# Altium PCB GWC-MCU-002-A.PcbDoc (part 1 of 2)
Units mm, origin at the board's own origin, x right, y up, seen from the top; angles counter-clockwise.
Board outline 121 x 53 mm, 2 copper layers (Top Layer, Bottom Layer), stack 1.601 mm thick; 192 components, 111 nets, 570 pads, 192 vias.
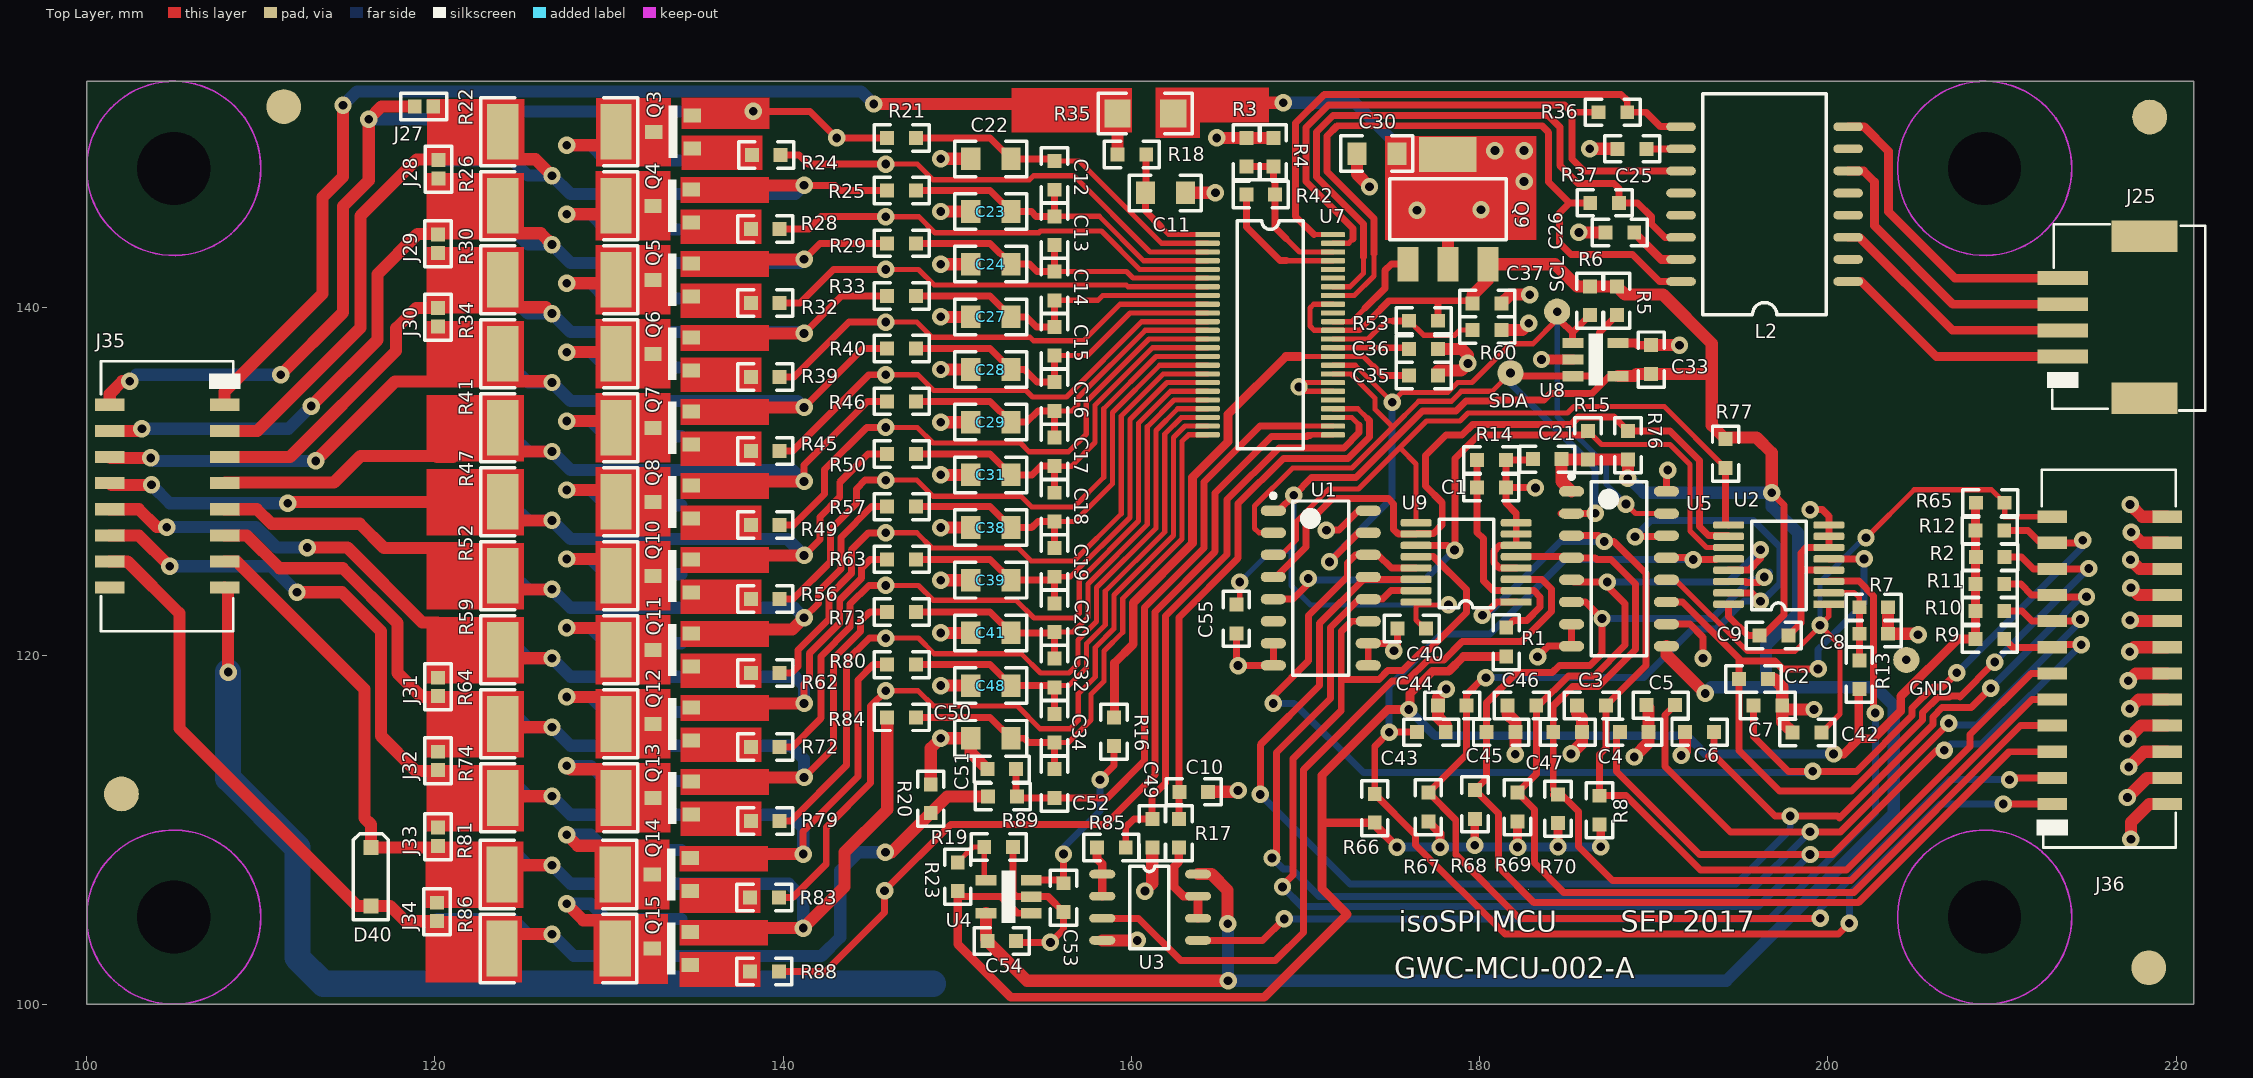
[diagram p0: Top Layer view]
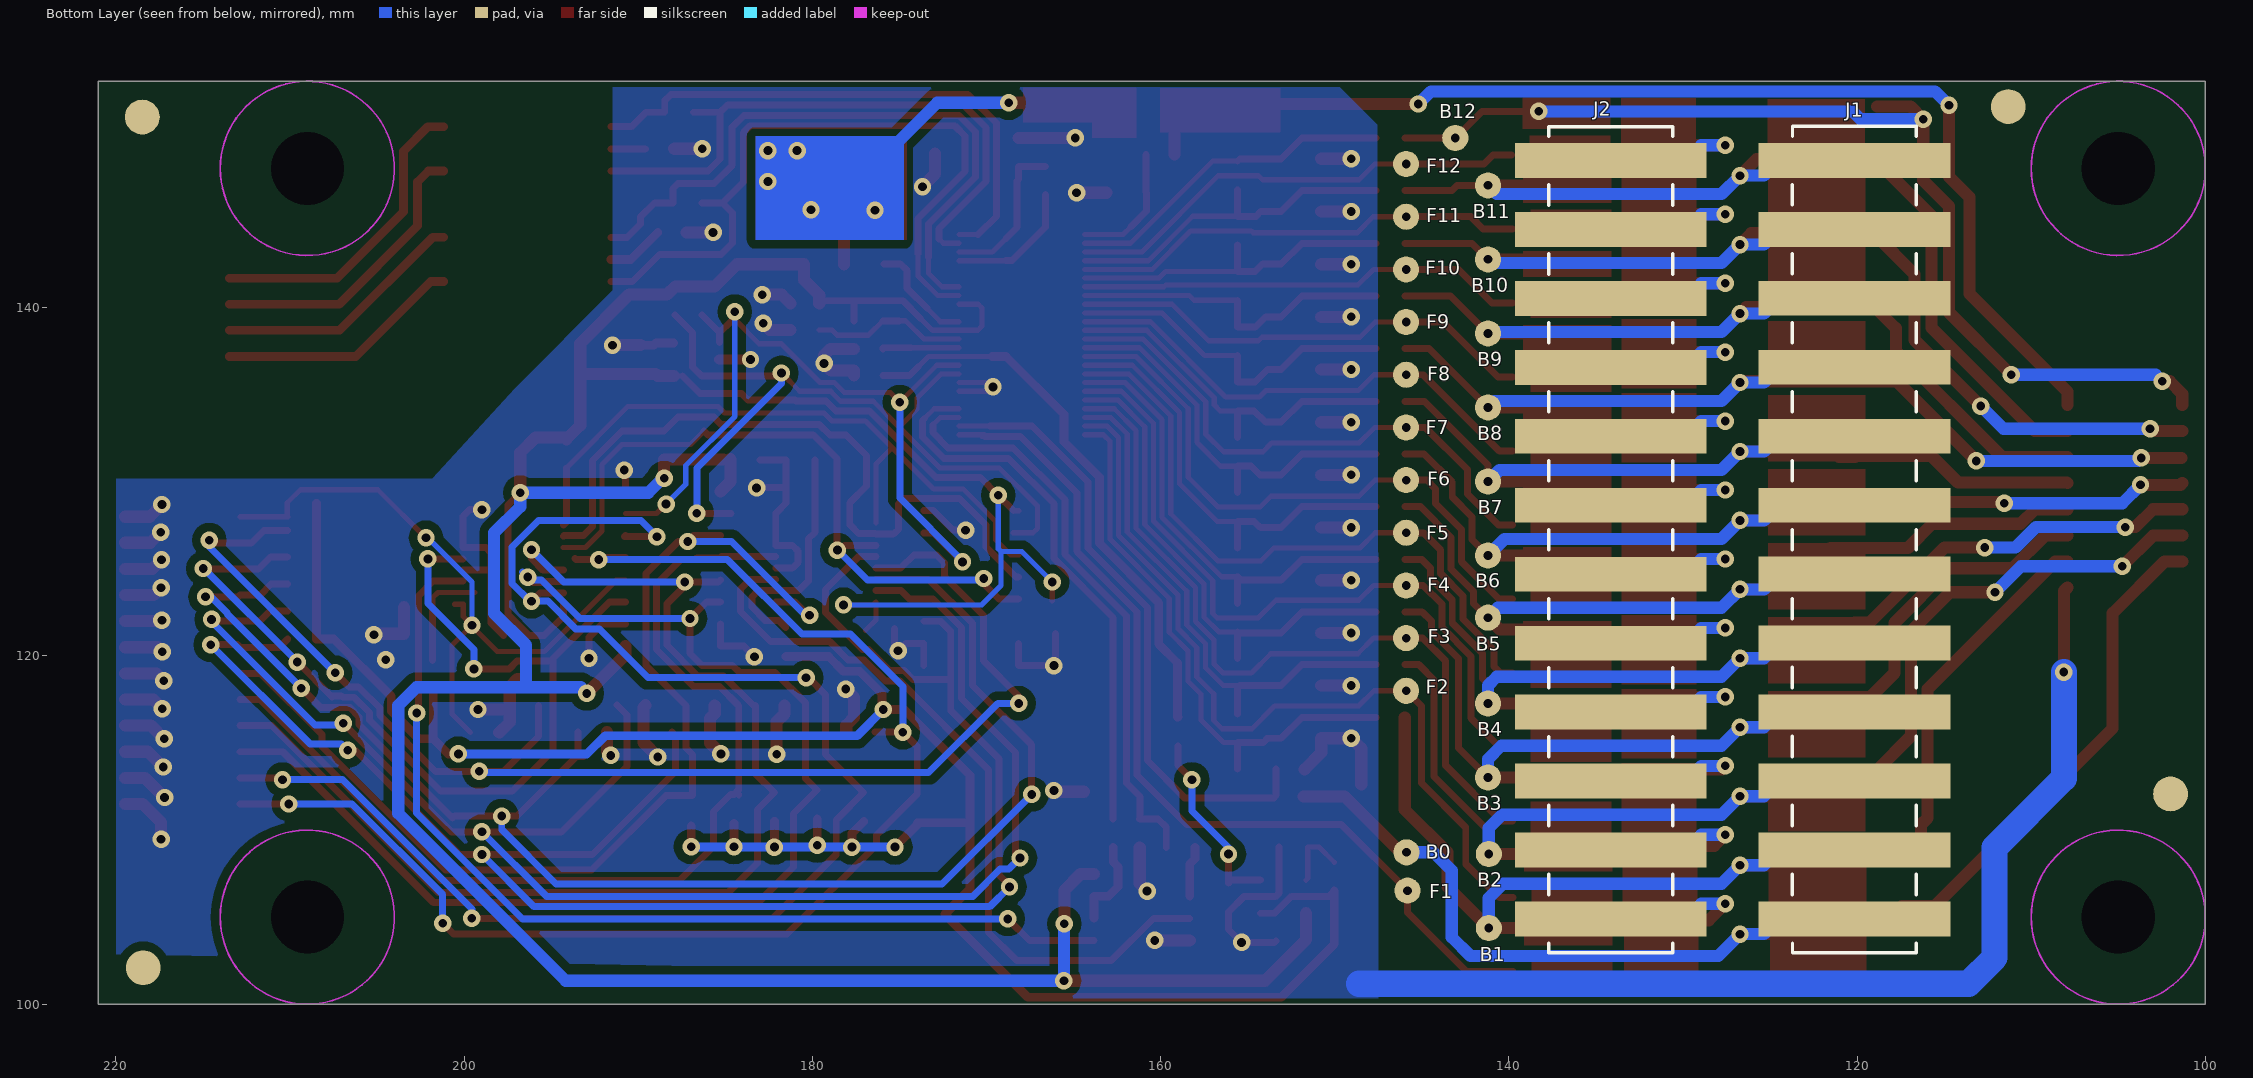
[diagram p1: Bottom Layer view, seen from below]

## Layer stack, top to bottom
Top Solder: solder mask 0.0102, Solder Resist, Dk 3.5
Top Layer: signal copper 0.0356
Dielectric1: core 1.53, FR-4, Dk 4.8
Bottom Layer: signal copper 0.0356
Bottom Solder: solder mask 0.0102, Solder Resist, Dk 3.5

## Board outline
100,100 221,100 221,153 100,153

## Design rules (kind name [scope] priority, off if disabled: settings)
AcuteAngle [All] p1: minimum=6.00000000000000E+0001 checktracksonly=FALSE
Clearance Clearance_1 [InNet('GND') And OnLayer('Bottom Layer')] p1: gap=0.5 ignorepadtopadclearanceinfootprint=FALSE except(0: Arc-Hole Track-Hole SMDPad-Hole THPad-Hole Via-Hole Fill-Hole Poly-Hole Region-Hole Text-Hole)
Clearance [All] p2: gap=0.2 ignorepadtopadclearanceinfootprint=FALSE except(0: Arc-Hole Track-Hole SMDPad-Hole THPad-Hole Via-Hole Fill-Hole Poly-Hole Region-Hole Text-Hole)
HoleSize [All] p1: absolutevalues=TRUE maxlimit=10 minlimit=0.5 maxpercent=80.000 minpercent=20.000
MinimumSolderMaskSliver [All] p1: minsoldermaskwidth=0.1
PolygonConnect PolygonConnect_1 [IsVia] p1: connectstyle=Direct reliefconductorwidth=0.254 reliefentries=4 polygonreliefangle="90 Angle" airgapwidth=0.254
PolygonConnect [All] p2: connectstyle=Relief reliefconductorwidth=0.5 reliefentries=4 polygonreliefangle="90 Angle" airgapwidth=0.254
RoutingVias [All] p1: holewidth=0.6 width=1.1 viastyle="Through Hole" minholewidth=0.5 minwidth=1 maxholewidth=1 maxwidth=2
SilkToSilkClearance [All] p1: silktosilkclearance=0.1
SilkToSolderMaskClearance SilkscreenOverComponentPads [IsPad] p1: minsilkscreentomaskgap=0.1 clearancetoexposedcopper=TRUE
SolderMaskExpansion [All] p1: expansion=0.102
Width [All] p1: maxlimit=10 minlimit=0.2 preferedwidth=0.4 minimp=50.000000 maximp=50.000000 favimp=50.000000
26 further rules are at their usual default settings.

## Classes and differential pairs
component class "GWC-MCU-002-A - Voltages": B0 B1 B2 B3 B4 B5 B6 B7 B8 B9 B10 B11 B12 C11 C12 C13 C14 C15 C16 C17 C18 C19 C20 C22 C23 C24 C25 C26 C27 C28 C29 C30 C31 C32 C33 C34 C35 C36 C37 C38 C39 C41 C48 C50 C51 C52 D40 F1 F2 F3 F4 F5 F6 F7 F8 F9 F10 F11 F12 GND J1 J2 J25 J27 J28 J29 J30 J31 J32 J33 J34 J35 L2 Q3 Q4 Q5 Q6 Q7 Q8 Q9 Q10 Q11 Q12 Q13 Q14 Q15 R3 R4 R5 R6 R18 R20 R21 R22 R24 R25 R26 R28 R29 R30 R32 R33 R34 R35 R36 R37 R39 R40 R41 R42 R45 R46 R47 R49 R50 R52 R53 R56 R57 R59 R60 R62 R63 R64 R72 R73 R74 R79 R80 R81 R83 R84 R86 R88 R89 SCL SDA U7 U8
component class "GWC-MCU-002-A - Temps": C1 C2 C3 C4 C5 C6 C7 C8 C9 C10 C21 C40 C42 C43 C44 C45 C46 C47 C49 C53 C54 C55 J36 R1 R2 R7 R8 R9 R10 R11 R12 R13 R14 R15 R16 R17 R19 R23 R65 R66 R67 R68 R69 R70 R76 R77 R85 U1 U2 U3 U4 U5 U9

## Components (designator, comment, footprint, x,y, rotation, side; value= is the part's Value field where it differs from the comment)
B0 "TP" "Test Point" 145.875,108.725 r270 bottom
B1 "TP" "Test Point" 141.15,104.375 r270 bottom
B2 "TP" "Test Point" 141.15,108.625 r180 bottom
B3 "TP" "Test Point" 141.2,113.025 r270 bottom
B4 "TP" "Test Point" 141.2,117.275 r180 bottom
B5 "TP" "Test Point" 141.2,122.2 r180 bottom
B6 "TP" "Test Point" 141.2,125.775 r180 bottom
B7 "TP" "Test Point" 141.2,130.025 r180 bottom
B8 "TP" "Test Point" 141.2,134.275 r180 bottom
B9 "TP" "Test Point" 141.2,138.525 r180 bottom
B10 "TP" "Test Point" 141.2,142.775 r180 bottom
B11 "TP" "Test Point" 141.2,147.025 r180 bottom
B12 "TP" "Test Point" 143.075,149.75 r180 bottom
C1 "100nF" C0603 180.675,129.675 r90 top
C2 "100nF" C0603 195.725,118.675 r90 top
C3 "100nF" C0603 186.425,117.15 r270 top
C4 "100nF" C0603 188.875,115.625 r90 top
C5 "100nF" C0603 190.4,117.175 r270 top
C6 "100nF" C0603 192.625,115.625 r270 top
C7 "100nF" C0603 196.55,117.15 r90 top
C8 "100nF" C0603 202.625,121.275 r90 top
C9 "100nF" C0603 196.9,121.175 r270 top
C10 "10nF" 0603 163.575,112.2 r270 top
C11 "100nF 100V" C0805 161.95,146.6 r90 top
C12 "10nF" 0603 155.575,147.6 r0 top
C13 "10nF" 0603 155.575,144.425 r0 top
C14 "10nF" 0603 155.575,141.25 r0 top
C15 "10nF" 0603 155.575,138.075 r0 top
C16 "10nF" 0603 155.575,134.9 r0 top
C17 "10nF" 0603 155.575,131.725 r0 top
C18 "10nF" 0603 155.575,128.55 r0 top
C19 "10nF" 0603 155.575,125.375 r0 top
C20 "10nF" 0603 155.575,122.2 r0 top
C21 "100nF" C0603 183.875,131.3 r90 top
C22 "100nF 100V" C0805 151.925,148.55 r270 top
C23 "100nF 100V" C0805 151.925,145.525 r270 top
C24 "100nF 100V" C0805 151.925,142.5 r270 top
C25 "100pF" C0603 188.75,149.125 r270 top
C26 "100pF" C0603 188.051,144.324 r270 top
C27 "100nF 100V" C0805 151.925,139.475 r270 top
C28 "100nF 100V" C0805 151.925,136.45 r270 top
C29 "100nF 100V" C0805 151.925,133.425 r270 top
C30 "100nF 100V" C0805 174.1,148.85 r270 top
C31 "100nF 100V" C0805 151.925,130.4 r270 top
C32 "10nF" 0603 155.575,119.025 r0 top
C33 "100nF" C0603 189.85,137.025 r0 top
C34 "10nF" 0603 155.575,115.85 r0 top
C35 "1uF" C0603 176.775,136.1 r90 top
C36 "1uF" C0603 176.775,137.625 r90 top
C37 "1uF" C0603 180.425,140.25 r90 top
C38 "100nF 100V" C0805 151.925,127.375 r270 top
C39 "100nF 100V" C0805 151.925,124.35 r270 top
C40 "100nF" C0603 176.1,121.575 r90 top
C41 "100nF 100V" C0805 151.925,121.325 r270 top
C42 "100nF" C0603 198.8,115.6 r270 top
C43 "100nF" C0603 177.225,115.625 r90 top
C44 "100nF" C0603 178.425,117.15 r270 top
C45 "100nF" C0603 181.225,115.625 r90 top
C46 "100nF" C0603 182.425,117.15 r270 top
C47 "100nF" C0603 185.05,115.625 r90 top
C48 "100nF 100V" C0805 151.925,118.3 r270 top
C49 "10nF" 0603 161.2,109.825 r180 top
C50 "100nF 100V" C0805 151.925,115.275 r270 top
C51 "10nF" 0603 152.55,113.5 r270 top
C52 "10nF" 0603 155.575,112.675 r0 top
C53 "100nF" C0603 156.1,106.125 r180 top
C54 "100nF" C0603 152.55,103.625 r270 top
C55 "100nF" C0603 166.025,122.125 r180 top
D40 "BAT46W-V" SOD-123 116.325,105.65 r0 top
F1 "TP" "Test Point" 145.825,106.525 r270 bottom
F2 "TP" "Test Point" 145.9,118 r180 bottom
F3 "TP" "Test Point" 145.9,121.025 r90 bottom
F4 "TP" "Test Point" 145.9,124.05 r180 bottom
F5 "TP" "Test Point" 145.9,127.075 r180 bottom
F6 "TP" "Test Point" 145.9,130.1 r180 bottom
F7 "TP" "Test Point" 145.9,133.125 r180 bottom
F8 "TP" "Test Point" 145.9,136.15 r180 bottom
F9 "TP" "Test Point" 145.9,139.175 r180 bottom
F10 "TP" "Test Point" 145.9,142.2 r180 bottom
F11 "TP" "Test Point" 145.9,145.225 r180 bottom
F12 "TP" "Test Point" 145.9,148.25 r180 bottom
GND "TP" "Test Point" 204.5,119.775 r0 top
J1 "12 Way FHP" "12 WAY FHP SOCKET" 120.15,126.68 r90 bottom locked
J2 "12 Way FHP" "12 WAY FHP SOCKET" 134.15,126.675 r90 bottom locked
J25 "SM04B-ZESS-TB" "4 Way ZESS Connecctor" 220.075,137.2 r90 top
J27 "Link" "Solder Link" 119.375,151.55 r180 top
J28 "Link" "Solder Link" 120.2,147.955 r90 top
J29 "Link" "Solder Link" 120.175,143.68 r90 top
J30 "Link" "Solder Link" 120.175,139.455 r90 top
J31 "Link" "Solder Link" 120.175,118.22 r90 top
J32 "Link" "Solder Link" 120.175,113.97 r90 top
J33 "Link" "Solder Link" 120.175,109.62 r90 top
J34 "Link" "Solder Link" 120.125,105.3 r90 top
J35 "SM16B-ZPDSS-TF" "16 Way ZPD Connecctor" 101.325,134.425 r270 top
J36 "SM24B-ZPDSS-TF" "24 Way ZPD Connecctor" 219.475,111.5 r90 top
L2 "HX1188" SO-16W-Choke 201.162,141.504 r180 top
Q3 "BSH205G2" SOT-23M 134.775,150.1 r90 top
Q4 "BSH205G2" SOT-23M 134.725,145.85 r90 top
Q5 "BSH205G2" SOT-23M 134.725,141.6 r90 top
Q6 "BSH205G2" SOT-23M 134.725,137.35 r90 top
Q7 "BSH205G2" SOT-23M 134.725,133.1 r90 top
Q8 "BSH205G2" SOT-23M 134.725,128.85 r90 top
Q9 "DZT5551" SOT-223T 178.175,142.5 r0 top
Q10 "BSH205G2" SOT-23M 134.725,124.6 r90 top
Q11 "BSH205G2" SOT-23M 134.725,120.35 r90 top
Q12 "BSH205G2" SOT-23M 134.725,116.1 r90 top
Q13 "BSH205G2" SOT-23M 134.725,111.85 r90 top
Q14 "BSH205G2" SOT-23M 134.675,107.45 r90 top
Q15 "BSH205G2" SOT-23M 134.675,103.2 r90 top
R1 "100K" 0603 181.525,120.8 r180 top
R2 "10K" 0603 209.325,125.675 r90 top
R3 "1K2" 0603 166.6,148.925 r180 top
R4 "1K2" 0603 168.15,148.925 r180 top
R5 "10K" 0603 187.875,140.4 r0 top
R6 "10K" 0603 186.325,140.4 r0 top
R7 "100K" 0603 202.625,122.8 r90 top
R8 "10K" 0603 186.875,111.15 r180 top
R9 "10K" 0603 209.3,120.975 r90 top
R10 "10K" 0603 209.3,122.575 r90 top
R11 "10K" 0603 209.3,124.125 r90 top
R12 "10K" 0603 209.3,127.2 r90 top
R13 "100K" 0603 201.8,118.925 r180 top
R14 "47K" 0603 180.675,131.25 r90 top
R15 "100K" 0603 186.225,132.1 r0 top
R16 "100R" 0603 159,115.65 r180 top
R17 "100R" 0603 162.725,109.825 r180 top
R18 "100R" 0603 160.025,148.8 r90 top
R19 "20K" 0603 152.375,109.025 r270 top
R20 "0R" 0603 148.475,111.8 r0 top
R21 "100R" 0603 146.8,149.75 r270 top
R22 "18R 1W" 2512 127.15,150.1 r90 top
R23 "10K" 0603 150.025,107.325 r180 top
R24 "3K3" 0603 139.025,148.775 r270 top
R25 "100R" 0603 146.8,146.725 r270 top
R26 "18R 1W" 2512 127.15,145.85 r90 top
R28 "3K3" 0603 138.975,144.525 r270 top
R29 "100R" 0603 146.8,143.7 r270 top
R30 "18R 1W" 2512 127.15,141.6 r90 top
R32 "3K3" 0603 138.975,140.275 r270 top
R33 "100R" 0603 146.8,140.675 r270 top
R34 "18R 1W" 2512 127.15,137.35 r90 top
R35 "220R" 1206 160.8,151.15 r270 top
R36 "120R" 0603 187.65,151.225 r90 top
R37 "120R" 0603 187.175,146.025 r90 top
R39 "3K3" 0603 138.975,136.025 r270 top
R40 "100R" 0603 146.8,137.65 r270 top
R41 "18R 1W" 2512 127.15,133.1 r90 top
R42 "1K4" 0603 167.425,146.5 r270 top
R45 "3K3" 0603 138.975,131.775 r270 top
R46 "100R" 0603 146.8,134.625 r270 top
R47 "18R 1W" 2512 127.15,128.85 r90 top
R49 "3K3" 0603 138.975,127.525 r270 top
R50 "100R" 0603 146.8,131.6 r270 top
R52 "18R 1W" 2512 127.15,124.6 r90 top
R53 "47K" 0603 176.775,139.25 r90 top
R56 "3K3" 0603 138.975,123.275 r270 top
R57 "100R" 0603 146.8,128.575 r270 top
R59 "18R 1W" 2512 127.15,120.35 r90 top
R60 "0R" 0603 180.425,138.725 r90 top
R62 "3K3" 0603 138.975,119.025 r270 top
R63 "100R" 0603 146.8,125.55 r270 top
R64 "18R 1W" 2512 127.15,116.1 r90 top
R65 "10K" 0603 209.325,128.8 r90 top
R66 "10K" 0603 173.975,111.25 r180 top
R67 "10K" 0603 177.05,111.325 r180 top
R68 "10K" 0603 179.725,111.475 r180 top
R69 "10K" 0603 182.175,111.325 r180 top
R70 "10K" 0603 184.5,111.225 r180 top
R72 "3K3" 0603 138.975,114.775 r270 top
R73 "100R" 0603 146.8,122.525 r270 top
R74 "18R 1W" 2512 127.15,111.85 r90 top
R76 "100K" 0603 188.525,132.1 r0 top
R77 "100K" 0603 194.125,131.625 r0 top
R79 "3K3" 0603 138.975,110.525 r270 top
R80 "100R" 0603 146.8,119.5 r270 top
R81 "18R 1W" 2512 127.1,107.45 r90 top
R83 "3K3" 0603 138.925,106.125 r270 top
R84 "100R" 0603 146.8,116.475 r270 top
R85 "100R" 0603 158.85,109 r90 top
R86 "18R 1W" 2512 127.1,103.2 r90 top
R88 "3K3" 0603 138.925,101.875 r270 top
R89 "100R" 0603 152.6,111.925 r270 top
SCL "TP" "Test Point" 184.45,139.775 r0 top
SDA "TP" "Test Point" 181.775,136.25 r0 top
U1 "TPIC2810" SOIC127P600-TPIC2810 170.875,123.9 r0 top
U2 "74HC4051PW" TSSOP-16 200.05,122.975 r180 top
U3 "MCP6062" SO-8 158.325,107.475 r0 top
U4 "MCP6061" SOT-23-5 154.25,106.175 r90 top
U5 "TPIC2810" SOIC127P600-TPIC2810 188,125.005 r0 top
U7 "LTC6811-1" SSOP-48 167.975,138.45 r0 top
U8 "24AA01" SOT-23-5 185.35,137.025 r270 top
U9 "74HC4051PW" TSSOP-16 182.1,123.1 r180 top

## Footprints (in the part's own frame and the unit in brackets; to place one, negate y for a bottom-side part, rotate by r counter-clockwise, add the part's x,y. Pads: shape width x height; smd on the part's side, far side on the other; paste and mask are expansions set on the pad)
"4 Way ZESS Connecctor" [mm] "SM04B-ZESS-TB(LF)(SN)"
  rect 1.8x3.8 smd: 0(-2.4,1.9) 0(6.9,1.9)
  rect 0.8x2.9 smd: 1(0,6.6) 2(1.5,6.6) 3(3,6.6) 4(4.5,6.6)
  silkscreen extent -3.1,-1.6 7.6,7.5, body extent -2.95,-1.55 7.55,7.15, height 5.8
"12 WAY FHP SOCKET" [mm] "12 way 3.96mm SMT socket"
  rect 2x11 smd: 1(-21.78,0) 2(-17.82,0) 3(-13.86,0) 4(-9.9,0) 5(-5.94,0) 6(-1.98,0) 7(1.98,0) 8(5.94,0) 9(9.9,0) 10(13.86,0) 11(17.82,0) 12(21.78,0)
  silkscreen extent -23.73,-3.55 23.73,3.56, body extent -24.03,-3.55 23.52,3.56, height 9.36
"16 Way ZPD Connecctor" [mm] "SM16B-ZPDSS-TF(LF)(SN)"
  rect 0.7x1.7 smd: 1(0,6.6) 2(0,0) 3(1.5,6.6) 4(1.5,0) 5(3,6.6) 6(3,0) 7(4.5,6.6) 8(4.5,0) 9(6,6.6) 10(6,0) 11(7.5,6.6) 12(7.5,0) 13(9,6.6) 14(9,0) 15(10.5,6.6) 16(10.5,0)
  silkscreen extent -2.5,-0.5 13,7.5, body extent -2.6,-0.5 13.1,7.1, height 7.65
"24 Way ZPD Connecctor" [mm] "SM24B-ZPDSS-TF"
  rect 0.7x1.7 smd: 1(0,6.6) 2(0,0) 3(1.5,6.6) 4(1.5,0) 5(3,6.6) 6(3,0) 7(4.5,6.6) 8(4.5,0) 9(6,6.6) 10(6,0) 11(7.5,6.6) 12(7.5,0) 13(9,6.6) 14(9,0) 15(10.5,6.6) 16(10.5,0) 17(12,6.6) 18(12,0) 19(13.5,6.6) 20(13.5,0) 21(15,6.6) 22(15,0) 23(16.5,6.6) 24(16.5,0)
  silkscreen extent -2.5,-0.5 19.2,7.5, body extent -2.6,-0.5 19.1,7.1, height 7.65
0603 [mm] "Generic surface mount part"
  rect 0.8x0.8 smd: 1(0,-0.825) 2(0,0.825)
  silkscreen extent -0.75,-1.58 0.75,1.58, body extent -0.4,-0.8 0.4,0.8, height 0.45
1206 [mm] "Generic surface mount part"
  rect 1.6x1.5 smd paste-0.15: 1(0,-1.6) 2(0,1.6)
  silkscreen extent -1.15,-2.71 1.15,2.71, body extent -0.8,-1.6 0.8,1.6, height 0.6
2512 [mm] "Generic surface mount part"
  rect 3.2x1.8 smd paste-0.18: 1(0,-3.25) 2(0,3.25)
  silkscreen extent -1.95,-4.5 1.95,4.5, body extent -1.6,-3.25 1.6,3.25, height 0.8
C0603 [mm] "Generic surface mount capacitor"
  rect 0.8x0.8 smd: 1(0,-0.825) 2(0,0.825)
  silkscreen extent -0.75,-1.58 0.75,1.58, body extent -0.4,-0.8 0.4,0.8, height 0.8
C0805 [mm] "Generic surface mount part"
  rect 1.3x1.1 smd paste-0.11: 1(0,-1.15) 2(0,1.15)
  silkscreen extent -1.02,-2.07 1.02,2.07, body extent -0.63,-1 0.62,1, height 1
SO-8 [mm] "Generic SO-8 surface mount package"
  oval 1.5x0.5 smd mask+0.09: 1(0,0) 2(0,-1.27) 3(0,-2.54) 4(0,-3.81) 5(5.5,-3.81) 6(5.5,-2.54) 7(5.5,-1.27) 8(5.5,0)
  silkscreen extent 1.58,-4.28 3.82,0.46, body extent 0.75,-4.3 4.75,0.5, height 1.6
SO-16W-Choke [mm] "300mil wide SO-16 for Ethernet transformer"
  oval 1.7x0.5 smd: 1(0,0) 2(0,-1.27) 3(0,-2.54) 4(0,-3.81) 5(0,-5.08) 6(0,-6.35) 7(0,-7.62) 8(0,-8.89) 9(9.6,-8.89) 10(9.6,-7.62) 11(9.6,-6.35) 12(9.6,-5.08) 13(9.6,-3.81) 14(9.6,-2.54) 15(9.6,-1.27) 16(9.6,0)
  silkscreen extent 1.25,-10.79 8.35,1.91, body extent 1.25,-10.79 8.35,1.91, height 6.55
SOD-123 [mm] "Generic Surface mount diode"
  rect 0.85x0.85 smd paste-0.1: A(0,0) K(0,3.35)
  silkscreen extent -1,-0.8 1,4.15, body extent -0.85,0.25 0.85,3.05, height 1.1
SOIC127P600-TPIC2810 [mm] "TPIC2810"
  oval 1.45x0.6 smd: 1(-2.725,4.445) 2(-2.725,3.175) 3(-2.725,1.905) 4(-2.725,0.635) 5(-2.725,-0.635) 6(-2.725,-1.905) 7(-2.725,-3.175) 8(-2.725,-4.445) 9(2.725,-4.445) 10(2.725,-3.175) 11(2.725,-1.905) 12(2.725,-0.635) 13(2.725,0.635) 14(2.725,1.905) 15(2.725,3.175) 16(2.725,4.445)
  silkscreen extent -2.85,-5 1.6,5.42, body extent -3,-5 3,5, height 2.65
"Solder Link" [mm] "Option link using solder bridge"
  rect 0.8x0.8 smd: 1(0.53,0) 2(-0.53,0)
  silkscreen extent -1.32,-0.75 1.32,0.75, body extent -0.78,-0.4 0.82,0.4, height 0.45
SOT-23-5 [mm] "Generic Surface mount SOT-23 5 pin package"
  rect 0.6x1.2 smd: 1(-0.95,0) 2(0,0) 3(0.95,0) 4(0.95,2.6) 5(-0.95,2.6)
  silkscreen extent -1.5,0.9 1.5,1.72, body extent -1.5,0.38 1.5,2.17, height 1.3
SOT-23M [mm] "Generic surface mount mosfet transistor"
  rect 0.8x1 smd: D(0,2.2) G(-0.95,0) S(0.95,0)
  silkscreen extent -1.5,0.85 1.5,1.35, body extent -1.5,0.38 1.5,1.78, height 1.1
SOT-223T [mm] "Generic surface mount bipolar transistor"
  rect 1.2x2 smd paste-0.1: B(-2.3,0) C(0,0) E(2.3,0)
  rect 3.3x2 smd paste-0.15: C(0,6.3)
  silkscreen extent -3.35,1.4 3.35,4.9, body extent -3.35,1.3 3.35,5, height 1.8
SSOP-48 [mm] "48 pin SSOP"
  rect 1.4x0.3 smd: 1(-3.6,5.75)
  rrect50% 1.4x0.3 smd: 2(-3.6,5.25) 3(-3.6,4.75) 4(-3.6,4.25) 5(-3.6,3.75) 6(-3.6,3.25) 7(-3.6,2.75) 8(-3.6,2.25) 9(-3.6,1.75) 10(-3.6,1.25) 11(-3.6,0.75) 12(-3.6,0.25) 13(-3.6,-0.25) 14(-3.6,-0.75) 15(-3.6,-1.25) 16(-3.6,-1.75) 17(-3.6,-2.25) 18(-3.6,-2.75) 19(-3.6,-3.25) 20(-3.6,-3.75) 21(-3.6,-4.25) 22(-3.6,-4.75) 23(-3.6,-5.25) 24(-3.6,-5.75) 25(3.6,-5.75) 26(3.6,-5.25) 27(3.6,-4.75) 28(3.6,-4.25) 29(3.6,-3.75) 30(3.6,-3.25) 31(3.6,-2.75) 32(3.6,-2.25) 33(3.6,-1.75) 34(3.6,-1.25) 35(3.6,-0.75) 36(3.6,-0.25) 37(3.6,0.25) 38(3.6,0.75) 39(3.6,1.25) 40(3.6,1.75) 41(3.6,2.25) 42(3.6,2.75) 43(3.6,3.25) 44(3.6,3.75) 45(3.6,4.25) 46(3.6,4.75) 47(3.6,5.25) 48(3.6,5.75)
  silkscreen extent -1.9,-6.55 1.9,6.55, body extent -2.8,-6.55 2.8,6.55, height 1.85
"Test Point" [mm] "Probe pad (single sided)"
  round 1.5 smd paste-1: 1(0,0)
TSSOP-16 [mm]
  rect 1.78x0.42 smd mask+0.09: 1(0,0)
  rrect50% 1.78x0.42 smd mask+0.09: 2(0,-0.65) 3(0,-1.3) 4(0,-1.95) 5(0,-2.6) 6(0,-3.25) 7(0,-3.9) 8(0,-4.55) 9(5.75,-4.55) 10(5.75,-3.9) 11(5.75,-3.25) 12(5.75,-2.6) 13(5.75,-1.95) 14(5.75,-1.3) 15(5.75,-0.65) 16(5.75,0)
  silkscreen extent 1.3,-4.75 4.43,0.33, body extent 0.6,-4.8 5.1,0.2, height 1.2

## Part data
B0 B1 B2 B3 B4 B5 B6 B7 B8 B9 B10 B11 B12 F1 F2 F3 F4 F5 F6 F7 F8 F9 F10 F11 F12 GND SCL SDA: "Test point", Manufacturer=NA, Part number="Test Point", Component Type=Pad, Specification="1.5mm dia Single Sided"
C1 C2 C3 C4 C5 C6 C7 C8 C9 C21 C33 C40 C42 C43 C44 C45 C46 C47 C53 C54 C55: library part "100nF X7R 0603", "100nF 0603 Non Polarised Capacitor", Manufacturer=Kemet, Part number=C0603C104K5RAC, Supplier Part Number 1=1288255, Tolerance=10%, Component Type=SMD, Specification="X7R 50V", Supplier=Farnell, Supplier 1=Farnell, Supplier 2=Digi-Key, Supplier 3=Arrow, Supplier 4=Newark, Supplier No.=128-8255, Supplier Part Number 2=399-5089-1-ND, Supplier Part Number 3=13owRFewPNmjSPXc-JuBeSWHfU3DuBufwBIDEpzGmQ0, Supplier Part Number 4=72J5992
C10 C12 C13 C14 C15 C16 C17 C18 C19 C20 C32 C34 C49 C51 C52: library part "10nF 0603 X7R", "10nF Non Polarised Capacitor", Manufacturer=Kemet, Part number=C0603C103K5RACTU, Supplier Part Number 1=1414609, Tolerance=10%, Component Type=SMD, Specification="X7R 50V", Supplier=Farnell, Supplier 1=Farnell, Supplier 2=Digi-Key, Supplier No.=141-4609, Supplier Part Number 2=399-1091-1-ND
C11 C22 C23 C24 C27 C28 C29 C30 C31 C38 C39 C41 C48 C50: library part "100nF X7R 0805", "100nF 0805 Non Polarised Capacitor", Manufacturer=AVX, Part number=08051C104K4T2A, Supplier Part Number 1=1833888, Tolerance=10%, Component Type=SMD, Specification="X7R 100V", Supplier=Farnell, Supplier 1=Farnell, Supplier 2=Digi-Key, Supplier 3=Arrow, Supplier 4=Newark, Supplier No.=183-3888, Supplier Part Number 2=478-4525-1-ND, Supplier Part Number 3=thCAXxQKhySVZl-gwSbrFi2B4okyfaS8lrYqWDAKxeI, Supplier Part Number 4=85R5692
C25 C26: library part "100pF 0603 COG", "100pF Non Polarised Capacitor", Manufacturer=Murata, Part number=GRM1885C1H101JA01D, Supplier Part Number 1=8819866, Tolerance=5%, Component Type=SMD, Specification=COG, Supplier=Farnell, Supplier 1=Farnell, Supplier 2=Digi-Key, Supplier No.=881-9866, Supplier Part Number 2=490-1427-1-ND
C35 C36 C37: library part "1uF X7R 0603", "1uF Non Polarised Capacitor", Manufacturer=Kemet, Part number=C0603C105K4RACTU, Supplier Part Number 1=1650837, Tolerance=10%, Component Type=SMD, Specification="X7R 16V", Supplier=Farnell, Supplier 1=Farnell, Supplier 2=Digi-Key, Supplier No.=165-0837, Supplier Part Number 2=399-7847-1-ND
D40: "Small Signal Schottky Diode", Manufacturer=Vishay, Part number="BAT46W-V / GS08", Supplier Part Number 1=1612327, Component Type=SMD, Specification="100V 150mA", Supplier=Farnell, Supplier 1=Farnell, Supplier No.=161-2327
J1 J2: library part "12 Way FHP SMT", "12 Way FHP SMT", Manufacturer=Samtec, Part number=FHP-12-02-T-S, Supplier Part Number 1=1931569, Component Type=SMT, Specification="3.96mm pitch", Supplier=Samtec, Supplier 1=Farnell, Supplier No.=FHP-12-02-T-S
J25: library part "4 Way CPT (Side Entry)", "4 Way CPT Connector (Side Entry)", Manufacturer=JST, Part number=SM04B1-CPTK-1A-TB, Component Type=SMD, Specification="3A 50V", Supplier=Mouser, Supplier No.=306-SM04B1-CPTK-1ATB
J27 J28 J29 J30 J31 J32 J33 J34: library part "Link Pad", "Bridge Link Pads", Component Type=Pad
J35: library part "Header 8X2", "Header, 16-Pin, Dual row, SM16B-ZPDSS-TF", LatestRevisionDate=17-Jul-2002, LatestRevisionNote="Re-released for DXP Platform.", Publisher="Altium Limited"
J36: library part "Header 12X2", "Header, 24-Pin, Dual row, SM24B-ZPDSS-TF", LatestRevisionDate=17-Jul-2002, LatestRevisionNote="Re-released for DXP Platform.", Publisher="Altium Limited"
L2: library part HX1188FNL, "Dual Ethernet Transformer & CM Choke", Manufacturer=Pulse, Part number=HX1188FNLT, Supplier Part Number 1=673-HX1188FNLT, Component Type=SMD, Specification="-40/+85 deg C 350uH 1:1", Supplier=Mouser, Supplier 1=Mouser, Supplier 2=Digi-Key, Supplier No.=673-HX1188FNLT, Supplier Part Number 2=553-2208-1-ND
Q3 Q4 Q5 Q6 Q7 Q8 Q10 Q11 Q12 Q13 Q14 Q15: library part BSH205, "P Channel MOSFET", Manufacturer=NXP, Supplier Part Number 1=2498570, Component Type=SMD, Part number=BSH205G2, Specification="P-CH 20V 2A 0.12R", Supplier=Farnell, Supplier 1=Farnell, Supplier No.=249-8570
Q9: "NPN Transistor", Manufacturer=DIODES, Supplier Part Number 1=2061423, Component Type=SMD, Part number=DZT5551, Specification="160V, 2W, 600mA", Supplier=Farnell, Supplier 1=Farnell, Supplier 2=Newark, Supplier No.=206-1423, Supplier Part Number 2=65T8243
R1 R7 R13 R15 R76 R77: library part "100K 0603 Resistor", "100K 0603 Resistor", Manufacturer=Phycomp, Part number=RC0603FR-07100KL, Supplier Part Number 1=1117236, Tolerance=1%, Component Type=SMD, Specification="0.063W 50V", Supplier=Farnell, Supplier 1=Farnell, Supplier 2=RS-Components, Supplier 3=Digi-Key, Supplier 4=TME, Supplier 5=Newark, Supplier No.=111-7236, Supplier Part Number 2=504-8940, Supplier Part Number 3=311-100KHRCT-ND, Supplier Part Number 4=RC0603FR-07100K, Supplier Part Number 5=68R0051
R2 R5 R6 R8 R9 R10 R11 R12 R65 R66 R67 R68 R69 R70: library part "10K 0603 Resistor", "10K 0603 Resistor", Manufacturer=Phycomp, Part number="2322 7046 1003", Supplier Part Number 1=1117235, Tolerance=1%, Component Type=SMD, Specification="0.063W 50V", Supplier=Farnell, Supplier 1=Farnell, Supplier No.=111-7235
R3 R4: library part "1K2 0603 Resistor", "1K2 0603 Resistor", Manufacturer=Multicomp, Part number=MCHP03W8F1201T5E, Supplier Part Number 1=1576284, Component Type=SMD, Specification="0.125W 50V", Supplier=Farnell, Supplier 1=Farnell, Supplier No.=157-6284
R14 R53: library part "47K 0603 Resistor", "47K 0603 Resistor", Manufacturer=Phycomp, Part number="2322 7046 4703", Supplier Part Number 1=9238689, Tolerance=1%, Component Type=SMD, Specification="0.1W 50V", Supplier=Farnell, Supplier 1=Farnell, Supplier No.=923-8689
R16 R17 R18 R19 R21 R23 R25 R29 R33 R40 R46 R50 R57 R63 R73 R80 R84 R85 R89: library part "100R 0603 Resistor", "100R 0603 Resistor", Manufacturer=Multicomp, Part number="MC 0.063W 0603 1% 100R", Supplier Part Number 1=9330364, Tolerance=1%, Component Type=SMD, Specification="0.063W 50V", Supplier=Farnell, Supplier 1=Farnell, Supplier No.=933-0364
R20 R60: library part "0R 0603 Link", "0R 0603 Link", Manufacturer=Multicomp, Part number="MC 0.063W 0603 0R", Supplier Part Number 1=9331662, Tolerance=1%, Component Type=SMD, Specification="0.1W 50V", Supplier=Farnell, Supplier 1=Farnell, Supplier No.=933-1662
R22 R26 R30 R34 R41 R47 R52 R59 R64 R74 R81 R86: library part "18R 2512 Resistor", "18R 2512 Resistor", Manufacturer=Tyco, Part number=352018RJT, Supplier Part Number 1=1265175, Tolerance=5%, Component Type=SMD, Specification=1W, Supplier=Farnell, Supplier 1=Farnell, Supplier 2=RS-Components, Supplier 3=Mouser, Supplier 4=Newark, Supplier No.=126-5175, Supplier Part Number 2=224-0171, Supplier Part Number 3=279-352018RJT, Supplier Part Number 4=18R3518
R24 R28 R32 R39 R45 R49 R56 R62 R72 R79 R83 R88: library part "3K3 0603 Resistor", "3K3 0603 Resistor", Manufacturer=Multicomp, Part number="MC 0.063W 0603 1% 3K3", Supplier Part Number 1=9331026, Tolerance=1%, Component Type=SMD, Specification="0.1W 50V", Supplier=Farnell, Supplier 1=Farnell, Supplier No.=933-1026
R35: library part "220R 1206 Resistor", "220R 1206 Resistor", Manufacturer="Tyco Electronics", Part number=CRG1206F220R, Supplier Part Number 1=223-2164, Tolerance=1%, Component Type=SMD, Specification=0.25W, Supplier=RS, Supplier 1=RS-Components, Supplier No.=223-2164
R36 R37: library part "120R 0603 Resistor", "120R 0603 Resistor", Manufacturer=Vishay, Part number=CRCW0603120RFKEAHP, Supplier Part Number 1=1738892, Tolerance=1%, Component Type=SMD, Specification="0.25W 75V", Supplier=Farnell, Supplier 1=Farnell, Supplier 2=Newark, Supplier No.=173-8892, Supplier Part Number 2=41R4624
R42: library part "1K4 0603 Resistor", "1K4 0603 Resistor", Manufacturer=Vishay, Part number=CRCW06031K40FKEA, Supplier Part Number 1=1469742, Tolerance=1%, Component Type=SMD, Specification="0.1W 75V", Supplier=Farnell, Supplier 1=Farnell, Supplier 2=Mouser, Supplier 3=Digi-Key, Supplier No.=146-9742, Supplier Part Number 2=71-CRCW0603-1.4K-E3, Supplier Part Number 3=541-1.40KHCT-ND
U1 U5: "TPIC2810D -  Led Driver, 8 Outputs, I2C, 3V-5.5V", Manufacturer=Texas, Supplier Part Number 1=595-TPIC2810D, Component Type=SMD, Part number=TPIC2810, Specification="-40/+85 deg C", Supplier=Farnell, Supplier 1=Mouser, Supplier 2=Digi-Key, Supplier No.=1648761, Supplier Part Number 2=296-21426-5-ND
U2 U9: "8 Channel Analogue Switch", Manufacturer=NXP, Part number=74HC4051PW-Q100,11, Supplier Part Number 1=2445304, Component Type=SMD, Specification="-40/+125 deg C", Supplier=Farnell, Supplier 1=Farnell, Supplier 2=Mouser, Supplier 3=Digi-Key, Supplier No.=244-5304, Supplier Part Number 2=771-74HC4051PW-Q100, Supplier Part Number 3=568-10114-1-ND
U3: "Dual Opamp", Manufacturer=Microchip, Part number=MCP6062-E/SN, Component Type=SMD, Specification="-40 to +125", Supplier=Farnell, Supplier No.=182-5029
U4: "Micropower CMOS Op Amp", Manufacturer=Microchip, Part number=MCP6061T-E/OT, Supplier Part Number 1=1863959, Component Type=SMD, Specification="Rail to rail In&Out, low Vos", Supplier=Farnell, Supplier 1=Farnell, Supplier 2=Digi-Key, Supplier 3=Newark, Supplier No.=186-3959, Supplier Part Number 2=MCP6061T-E/OTCT-ND, Supplier Part Number 3=23T2817
U7: "Multicell  Battery Stack Monitor", Manufacturer="Linear Tech", Part number=LTC6811G-1, Component Type=SMD, Specification=60V, Supplier=Linear, Supplier No.=LTC6811G-1
U8: "1K I2C EEPROM", Manufacturer=Atmel, Part number=24AA01T-I/OT, Supplier Part Number 1=1331269, Component Type=SMD, Specification="-40/+85 deg C 1.7-5.5V", Supplier=Farnell, Supplier 1=Farnell, Supplier 2=Digi-Key, Supplier 3=Arrow, Supplier 4=TME, Supplier 5=Newark, Supplier No.=133-1269, Supplier Part Number 2=24AA01T-I/OTCT-ND, Supplier Part Number 3=qa4xD_1fnMD5lAuD9KKDLGSjiRfODrYyphIlkbDuu6Y, Supplier Part Number 4=24AA01T-I/OT, Supplier Part Number 5=35M0694

## Free pads (board coordinates)
  round 4 hole 4.2 unplated: 0(105,105) 0(105,148) 0(209,105) 0(209,148)
  round 2 smd paste+0.4 mask+0.4: 1(111.325,151.55) 2(102,112.075) 3(218.425,102.1) 4(218.475,150.95)
  round 2 smd far side paste+0.4 mask+0.4: 1(111.325,151.55) 2(102,112.075) 3(218.425,102.1) 4(218.475,150.95)

## Via types
v1: diameter 1, hole 0.5, Top Layer to Bottom Layer, 192 vias

## Nets (pads, with @x,y where several pads share a name; then routed paths per layer and width w, separated by ;. In a path a pad name is that pad's centre, name@x,y a point inside that pad or via, vN(x,y) a via of type N, cw(c..) or ccw(c..) an arc to the next point about the centre after c; other vN are vias at no path point)
+5V: C9.1 C21.1 C33.1 C37.2 C40.1 C54.1 C55.1 Q9.E R5.2 R6.2 R15.1 R53.1 R76.1 R77.2 U1.1 U2.16 U3.8 U4.5 U5.1 U5.9 U7.37 U7.40 U8.4 U9.16 | length 220.9
  Top Layer w0.3: C55.1@166.225,123.15 v1(166.225,124.25) ; U1.1@168.15,128.345 U1.1@168.445,128.345 ; U7.40@171.575,140.2 170.475,140.2 170.25,139.975 170.25,138.95 170.5,138.7 U7.37@171.575,138.7 173.1,138.7 173.814,139.414 ; C40.1@176.95,121.475 176.35,122.075 U9.16@176.35,123.1 176.519,122.931 v1(178.209,122.931) ; U8.4@187.45,136.075 U8.4@187.95,136.075
  Top Layer w0.4: U1.1@168.445,128.345 v1(169.325,129.225) 170.35,130.25 172.901,130.25 176.726,134.075 178.65,134.075 179.225,134.65 180.953,134.65 181.003,134.7 183.7,134.7 184.075,135.075 186.45,135.075 U8.4@187.45,136.075 ; 173.814,139.414 174.8,140.4 177.6,140.4 ; R53.1@177.6,139.25 177.6,140.4 ; C37.2@179.45,140.4 177.6,140.4 ; U2.16@194.3,122.975 194.3,122.275 195.4,121.175 C9.1@196.075,121.175 196.284,121.175 197.475,122.366 197.475,128.675 v1(196.775,129.375)
  Top Layer w0.7: U4.5@151.65,105.225 151.65,103.7 C54.1@151.725,103.625 154,101.35 v1(165.55,101.35) ; U3.8@163.825,107.475 164.6,107.475 165.525,106.55 v1(165.525,104.625) ; C37.2@179.6,140.25 179.6,140.725 180.475,141.6 Q9.E@180.475,142.5 184.325,142.5 185.6,141.225 R5.2@187.875,141.225 188.346,140.754 190.521,140.754 193.325,137.95 193.325,133.25 R77.2@194.125,132.45 ; C21.1@184.7,131.3 184.7,130.025 U5.1@185.275,129.45 ; 185.1,131.275 R15.1@186.225,131.275 R76.1@188.525,131.275 188.525,130.175 188.509,130.191 v1(188.509,130.206) ; U8.4@187.95,136.075 188.875,136.075 189,136.2 C33.1@189.85,136.2 193.325,136.2 ; U5.9@190.725,120.56 190.725,120.075 v1(192.95,117.85) ; R77.2@194.125,132.55 195.9,132.55 196.775,131.675 v1(196.775,129.375)
  Bottom Layer w0.3: v1(166.225,124.25) 167.975,126 169.165,126 ; v1(169.325,129.225) 169.325,126.16 169.165,126 ; v1(178.209,122.931) 170.276,122.931 169.165,124.042 169.165,126
  Bottom Layer w0.7: v1(165.525,104.625) 165.55,104.6 v1(165.55,101.35) 194.163,101.35 203.775,110.962 203.775,117.16 202.735,118.2 196.45,118.2 ; v1(188.509,130.206) 188.594,130.206 189.426,129.375 v1(196.775,129.375) 196.775,128.575 198.275,127.075 198.275,122.45 196.45,120.625 196.45,118.2 ; v1(192.95,117.85) 193.3,118.2 196.45,118.2
C1_1: B0.1 D40.A J1.1 J34.2 J35.14 R20.1 R86.2 R89.1 | length 71.8
  Top Layer w0.7: J35.14@101.325,125.425 102.35,125.425 105.325,122.45 105.325,115.85 115.525,105.65 D40.A@116.325,105.65 117.425,105.65 118.305,104.77 J34.2@120.125,104.77 ; R86.2@124.675,104.025 v1(126.725,104.025) ; v1(145.875,108.725) 146.225,108.725 R20.1@148.475,110.975 149.425,111.925 R89.1@151.775,111.925
  Bottom Layer w0.7: J1.1@120.15,104.9 124.475,104.9 125.35,104.025 v1(126.725,104.025) 127.975,102.775 142.2,102.775 143.275,103.85 143.275,107.675 144.325,108.725 v1(145.875,108.725)
C1_2: J2.1 Q15.D R86.1 | length 8.9
  Top Layer w0.7: v1(127.575,105.77) 128.52,104.825 129.15,104.825
  Bottom Layer w0.7: v1(127.575,105.77) 128.95,105.77 129.825,104.895 J2.1@134.15,104.895
C2_1: B1.1 D40.K J1.2 J33.2 J34.1 J35.13 Q15.S R81.2 R84.1 | length 69.1
  Top Layer w0.7: J35.13@107.925,125.425 108.625,125.425 115.95,118.1 115.95,110.7 116.325,110.325 D40.K@116.325,109 J33.2@120.085,109 ; R81.2@124.385,107.985 v1(126.725,107.985) ; 136.475,104.375 v1(141.15,104.375) 143.525,106.75 143.525,108.725 145.975,111.175 R84.1@145.975,116.475
  Bottom Layer w0.7: J1.2@120.15,108.86 124.475,108.86 125.35,107.985 v1(126.725,107.985) 127.785,106.925 140.325,106.925 141.15,106.1 v1(141.15,104.375)
C2_2: J2.2 Q14.D R81.1 | length 9
  Top Layer w0.7: v1(127.575,109.73) 128.205,109.1 129.35,109.1
  Bottom Layer w0.7: v1(127.575,109.73) 128.95,109.73 129.825,108.855 J2.2@134.15,108.855
C3_1: B2.1 J1.3 J32.2 J33.1 J35.12 Q14.S R74.2 R80.1 | length 74.9
  Top Layer w0.4: v1(141.15,108.625) 141.15,109.925 144.3,113.075 144.3,118.625 145.175,119.5 R80.1@145.975,119.5
  Top Layer w0.7: J35.12@101.325,126.925 103,126.925 v1(104.775,125.15) ; v1(112.08,123.656) 114.669,123.656 116.9,121.425 116.9,115.4 118.9,113.4 120.775,113.4 120.775,112.8 121.725,111.85 ; R74.2@123.995,111.945 v1(126.725,111.945) ; 136.475,108.625 v1(141.15,108.625)
  Bottom Layer w0.7: v1(104.775,125.15) 110.587,125.15 v1(112.08,123.656) ; J1.3@120.15,112.82 124.475,112.82 125.35,111.945 v1(126.725,111.945) 127.785,110.885 140.39,110.885 141.15,110.125 v1(141.15,108.625)
C3_2: J2.3 Q13.D R74.1 | length 9.1
  Top Layer w0.7: v1(127.575,113.69) 127.765,113.5 129.7,113.5
  Bottom Layer w0.7: v1(127.575,113.69) 128.95,113.69 129.825,112.815 J2.3@134.15,112.815
C4_1: B3.1 J1.4 J31.2 J32.1 J35.11 Q13.S R64.2 R73.1 | length 62.6
  Top Layer w0.4: v1(141.2,113.025) 142.9,114.725 142.9,119.854 144.45,121.404 144.45,122 144.975,122.525 R73.1@145.975,122.525
  Top Layer w0.7: J35.11@107.925,126.925 109.2,126.925 111.085,125.04 114.71,125.04 117.85,121.9 117.85,119.025 119.225,117.65 120.175,117.65 121.725,116.1 ; R64.2@124.095,115.905 v1(126.725,115.905) ; 136.525,113.025 v1(141.2,113.025)
  Bottom Layer w0.7: J1.4@120.15,116.78 124.475,116.78 125.35,115.905 v1(126.725,115.905) 127.785,114.845 140.43,114.845 141.2,114.075 v1(141.2,113.025)
C4_2: J2.4 Q12.D R64.1 | length 8.9
  Top Layer w0.7: v1(127.575,117.65) R64.1@129.575,117.65
  Bottom Layer w0.7: v1(127.575,117.65) 128.95,117.65 129.825,116.775 J2.4@134.15,116.775
C5_1: B4.1 J1.5 J31.1 J35.10 Q12.S R59.2 R63.1 | length 62.4
  Top Layer w0.4: v1(141.2,117.275) 141.2,118.4 141.5,118.7 141.5,120.151 143.25,121.901 143.25,123.224 144.512,124.486 144.512,125.063 145,125.55 R63.1@145.975,125.55
  Top Layer w0.7: J35.10@101.325,128.425 103,128.425 104.025,127.4 v1(104.6,127.4) ; v1(112.675,126.225) 114.975,126.225 119.275,121.925 120.15,121.925 ; R59.2@124.385,119.865 v1(126.725,119.865) ; 136.525,117.275 v1(141.2,117.275)
  Bottom Layer w0.7: v1(104.6,127.4) 109.725,127.4 110.9,126.225 v1(112.675,126.225) ; J1.5@120.15,120.74 124.475,120.74 125.35,119.865 v1(126.725,119.865) 127.785,118.805 140.695,118.805 141.2,118.3 v1(141.2,117.275)
C5_2: J2.5 Q11.D R59.1 | length 9
  Top Layer w0.7: v1(127.575,121.61) R59.1@129.61,121.61
  Bottom Layer w0.7: v1(127.575,121.61) 128.95,121.61 129.825,120.735 J2.5@134.15,120.735
C6_1: B5.1 J1.6 J35.9 Q11.S R52.2 R57.1 | length 52.6
  Top Layer w0.4: v1(141.2,122.2) 142.025,123.025 142.025,123.696 143.313,124.983 143.313,126.813 145.075,128.575 R57.1@145.975,128.575
  Top Layer w0.7: J35.9@107.925,128.425 109.775,128.425 110.61,127.59 115.685,127.59 117.08,126.195 121.525,126.195 ; R52.2@124.6,123.825 v1(126.725,123.825) ; 136.525,121.525 140.525,121.525 v1(141.2,122.2)
  Bottom Layer w0.7: J1.6@120.15,124.7 124.475,124.7 125.35,123.825 v1(126.725,123.825) 127.785,122.765 140.635,122.765 v1(141.2,122.2)
C6_2: J2.6 Q10.D R52.1 | length 8.9
  Top Layer w0.7: v1(127.575,125.57) R52.1@129.57,125.57
  Bottom Layer w0.7: v1(127.575,125.57) 128.95,125.57 129.825,124.695 J2.6@134.15,124.695
C7_1: B6.1 J1.7 J35.8 Q10.S R47.2 R50.1 | length 58.3
  Top Layer w0.4: v1(141.2,125.775) 142.113,126.688 142.113,127.988 143.25,129.125 143.25,129.975 144.875,131.6 R50.1@145.975,131.6
  Top Layer w0.7: J35.8@101.325,129.925 101.425,129.825 v1(103.725,129.825) ; v1(111.55,128.775) 111.625,128.85 121.725,128.85 ; R47.2@124.71,127.785 v1(126.725,127.785) ; 136.525,125.775 v1(141.2,125.775)
  Bottom Layer w0.7: v1(103.725,129.825) 104.775,128.775 v1(111.55,128.775) ; J1.7@120.15,128.66 124.475,128.66 125.35,127.785 v1(126.725,127.785) 127.785,126.725 140.25,126.725 v1(141.2,125.775)
C7_2: J2.7 Q8.D R47.1 | length 9.1
  Top Layer w0.7: v1(127.575,129.53) R47.1@129.72,129.53
  Bottom Layer w0.7: v1(127.575,129.53) 128.95,129.53 129.825,128.655 J2.7@134.15,128.655
C8_1: B7.1 J1.8 J35.7 Q8.S R41.2 R46.1 | length 50.1
  Top Layer w0.4: v1(141.2,130.025) 141.2,130.975 144.85,134.625 R46.1@145.975,134.625
  Top Layer w0.7: J35.7@107.925,129.925 107.96,129.96 114.21,129.96 115.73,131.48 120.175,131.48 120.12,131.425 121.045,131.425 ; R41.2@124.57,131.745 v1(126.725,131.745) ; 136.525,130.025 v1(141.2,130.025)
  Bottom Layer w0.7: J1.8@120.15,132.62 124.475,132.62 125.35,131.745 v1(126.725,131.745) 127.785,130.685 140.54,130.685 v1(141.2,130.025)
C8_2: J2.8 Q7.D R41.1 | length 9.4
  Top Layer w0.7: v1(127.575,133.49) R41.1@130.01,133.49
  Bottom Layer w0.7: v1(127.575,133.49) 128.95,133.49 129.825,132.615 J2.8@134.15,132.615
C9_1: B8.1 J1.9 J30.2 J35.6 Q7.S R34.2 R40.1 | length 55.8
  Top Layer w0.4: v1(141.2,134.275) 144.575,137.65 R40.1@145.975,137.65
  Top Layer w0.7: J35.6@101.375,131.375 v1(103.675,131.375) ; v1(113.15,131.2) 117.71,135.76 120.15,135.76 ; R34.2@124.55,135.775 126.655,135.775 v1(126.725,135.705) ; 136.525,134.275 v1(141.2,134.275)
  Bottom Layer w0.7: v1(103.675,131.375) 103.85,131.2 v1(113.15,131.2) ; J1.9@120.15,136.58 124.475,136.58 125.35,135.705 v1(126.725,135.705) 127.785,134.645 140.83,134.645 v1(141.2,134.275)
C9_2: J2.9 Q6.D R34.1 | length 9.7
  Top Layer w0.7: v1(127.575,137.45) R34.1@130.3,137.45
  Bottom Layer w0.7: v1(127.575,137.45) 128.95,137.45 129.825,136.575 J2.9@134.15,136.575
C10_1: B9.1 J1.10 J29.2 J30.1 J35.5 Q6.S R30.2 R33.1 | length 51.2
  Top Layer w0.4: v1(141.2,138.525) 143.35,140.675 R33.1@145.975,140.675
  Top Layer w0.7: J35.5@107.925,131.425 111.675,131.425 117.775,137.525 117.775,138.825 118.93,139.98 J30.1@120.15,139.98 ; R30.2@124.45,140.025 126.365,140.025 v1(126.725,139.665) ; 136.525,138.525 v1(141.2,138.525)
  Bottom Layer w0.7: J1.10@120.15,140.54 124.475,140.54 125.35,139.665 v1(126.725,139.665) 127.785,138.605 141.12,138.605 v1(141.2,138.525)
C10_2: J2.10 Q5.D R30.1 | length 9.6
  Top Layer w0.7: v1(127.575,141.41) R30.1@130.21,141.41
  Bottom Layer w0.7: v1(127.575,141.41) 128.95,141.41 129.825,140.535 J2.10@134.15,140.535
C11_1: B10.1 J1.11 J28.2 J29.1 J35.4 Q5.S R26.2 R29.1 | length 59.6
  Top Layer w0.4: v1(141.2,142.775) 142.125,143.7 R29.1@145.975,143.7
  Top Layer w0.7: J35.4@101.325,132.925 103.05,132.925 v1(103.175,133.05) ; v1(112.9,134.35) 116.7,138.15 116.7,141.925 119.005,144.23 J29.1@120.05,144.23 ; 124.825,144.275 126.075,144.275 v1(126.725,143.625) ; 136.525,142.775 v1(141.2,142.775)
  Bottom Layer w0.7: v1(103.175,133.05) 111.6,133.05 v1(112.9,134.35) ; J1.11@120.15,144.5 124.475,144.5 125.35,143.625 v1(126.725,143.625) 127.785,142.565 140.99,142.565 v1(141.2,142.775)
C11_2: J2.11 Q4.D R26.1 | length 9.3
  Top Layer w0.7: v1(127.575,145.37) R26.1@129.92,145.37
  Bottom Layer w0.7: v1(127.575,145.37) 128.95,145.37 129.825,144.495 J2.11@134.15,144.495
C12_1: B11.1 J1.12 J27.2 J28.1 J35.3 Q4.S R22.2 R25.1 | length 58.3
  Top Layer w0.4: v1(141.2,147.025) 142.975,147.025 143.275,146.725 R25.1@145.975,146.725
  Top Layer w0.7: J35.3@107.925,132.925 109.799,132.925 115.725,138.851 115.725,145.275 118.955,148.505 J28.1@120.2,148.505 ; R22.2@123.9,150.1 123.9,149.625 125,148.525 125.785,148.525 v1(126.725,147.585) ; 136.525,147.025 v1(141.2,147.025)
  Bottom Layer w0.7: J1.12@120.15,148.46 124.475,148.46 125.35,147.585 v1(126.725,147.585) 127.785,146.525 140.7,146.525 v1(141.2,147.025)
C12_2: J2.12 Q3.D R22.1 | length 9
  Top Layer w0.7: v1(127.575,149.33) R22.1@129.63,149.33
  Bottom Layer w0.7: v1(127.575,149.33) 128.95,149.33 129.825,148.455 J2.12@134.15,148.455
CELL0_AI_V_MX: C51.2 C52.1 R89.2 U7.26 | length 36
  Top Layer w0.3: 169.825,133.2 U7.26@171.575,133.2
  Top Layer w0.4: C51.2@153.375,113.5 153.375,111.975 R89.2@153.425,111.925 153.5,111.85 C52.1@155.575,111.85 158.614,111.85 160.75,113.986 160.75,122.784 164.165,126.199 164.165,129.99 167.375,133.2 169.825,133.2
CELL1_AI_V_MX: C34.1 C50.2 C52.2 R84.2 U7.24 | length 32.5
  Top Layer w0.3: C34.1@155.575,115.025 156.382,115.025 157.675,116.318 157.675,117.8 158.425,118.55 158.425,120.288 159.5,121.363 159.5,123.302 162.912,126.715 162.912,132.331 163.282,132.7 U7.24@164.375,132.7
  Top Layer w0.4: R84.2@147.625,116.475 151.875,116.475 C50.2@153.075,115.275 153.85,115.275 154.1,115.025 C34.1@155.575,115.025 C52.2@155.575,113.5
CELL2_AI_V_MX: C32.1 C34.2 C48.2 R80.2 U7.22 | length 30.5
  Top Layer w0.3: C32.1@155.475,118.3 156.4,118.3 157.425,119.325 157.425,120.702 158.5,121.777 158.5,123.716 161.912,127.129 161.912,132.745 162.868,133.7 U7.22@164.375,133.7
  Top Layer w0.4: R80.2@147.625,119.5 151.875,119.5 C48.2@153.075,118.3 155.475,118.3 C32.1@155.575,118.2 C34.2@155.575,116.675
CELL3_AI_V_MX: C20.1 C32.2 C41.2 R73.2 U7.20 | length 28.7
  Top Layer w0.3: C20.1@155.575,121.375 156.65,121.375 157.5,122.225 157.5,124.13 160.912,127.543 160.912,133.159 162.453,134.7 U7.20@164.375,134.7
  Top Layer w0.4: R73.2@147.625,122.525 151.875,122.525 C41.2@153.075,121.325 155.525,121.325 C20.1@155.575,121.375 C32.2@155.575,119.85
CELL4_AI_V_MX: C19.1 C20.2 C39.2 R63.2 U7.18 | length 26.8
  Top Layer w0.3: C19.1@155.575,124.55 156.505,124.55 159.912,127.957 159.912,133.573 162.039,135.7 U7.18@164.375,135.7
  Top Layer w0.4: R63.2@147.625,125.55 151.875,125.55 C39.2@153.075,124.35 155.375,124.35 C19.1@155.575,124.55 C20.2@155.575,123.025
CELL5_AI_V_MX: C18.1 C19.2 C38.2 R57.2 U7.16 | length 25
  Top Layer w0.3: C18.1@155.575,127.725 156.745,127.725 158.912,129.893 158.912,133.987 161.625,136.7 U7.16@164.375,136.7
  Top Layer w0.4: R57.2@147.625,128.575 151.875,128.575 C38.2@153.075,127.375 154.275,127.375 154.625,127.725 C18.1@155.575,127.725 C19.2@155.575,126.2
CELL6_AI_V_MX: C17.1 C18.2 C31.2 R50.2 U7.14 | length 23
  Top Layer w0.3: C17.1@155.575,130.9 156.55,130.9 157.913,132.262 157.913,134.402 161.211,137.7 U7.14@164.375,137.7
  Top Layer w0.4: R50.2@147.625,131.6 151.875,131.6 C31.2@153.075,130.4 154.3,130.4 154.8,130.9 C17.1@155.575,130.9 C18.2@155.575,129.375
CELL7_AI_V_MX: C16.1 C17.2 C29.2 R46.2 U7.12 | length 21.2
  Top Layer w0.3: C16.1@155.575,134.075 156.575,134.075 156.913,134.413 156.913,134.816 160.797,138.7 U7.12@164.375,138.7
  Top Layer w0.4: R46.2@147.625,134.625 151.875,134.625 C29.2@153.075,133.425 153.975,133.425 154.625,134.075 C16.1@155.575,134.075 C17.2@155.575,132.55
CELL8_AI_V_MX: C15.1 C16.2 C28.2 R40.2 U7.10 | length 20.1
  Top Layer w0.3: C15.1@155.575,137.25 157.475,137.25 159.925,139.7 U7.10@164.375,139.7
  Top Layer w0.4: R40.2@147.625,137.65 151.875,137.65 C28.2@153.075,136.45 153.85,136.45 154.575,135.725 C16.2@155.575,135.725 C15.1@155.575,137.25